# EAGLE board Ex Pin Expander (EAGLE 7.2.0)

Size 27 x 36 mm. Coordinates in mm from the lower left corner, seen from the top.
Outline: 0,0 27,0 27,36 0,36 0,0
Copper layers (1*16): Top 0.035mm / dielectric 1.5mm / Bottom 0.035mm
Design rules "default": minimum track width 10mil, minimum drill 24mil, track to track 8mil, track to pad 8mil, pad to pad 8mil, via to via 8mil, smd to smd 8mil, copper to edge 40mil, drill to drill 8mil, minimum pad ring 10mil, minimum via ring 8mil, stop-mask expansion 4mil, vias tented up to drill 0mil, thermal gap 10mil

## Footprints (pad centres in the part's own frame; a part is rotated, then mirrored left to right if it is on the bottom)
1X10-BIG = drill 1.016 pad 1.778 octagon: 1 -11.43,0; 2 -8.89,0; 3 -6.35,0; 4 -3.81,0; 5 -1.27,0; 6 1.27,0; 7 3.81,0; 8 6.35,0; 9 8.89,0; 10 11.43,0

## Placement (x,y rotation side)
NUSBIO_IN_0  PINHD-1X10  [1X10-BIG]  13.5,1.5 180 top
NUSBIO_OUT_0  PINHD-1X10  [1X10-BIG]  13.5,34.5 180 top
NUSBIO_OUT_1  PINHD-1X10  [1X10-BIG]  25,17 270 top
NUSBIO_OUT_2  PINHD-1X10  [1X10-BIG]  2,17 270 top

## Library data of the parts
NUSBIO_IN_0 NUSBIO_OUT_0 NUSBIO_OUT_1 NUSBIO_OUT_2 = adafruit

## Nets
N$1: NUSBIO_IN_0.10 NUSBIO_OUT_0.10 NUSBIO_OUT_1.10 NUSBIO_OUT_2.10
N$2: NUSBIO_IN_0.9 NUSBIO_OUT_0.9 NUSBIO_OUT_1.9 NUSBIO_OUT_2.9
N$3: NUSBIO_IN_0.8 NUSBIO_OUT_0.8 NUSBIO_OUT_1.8 NUSBIO_OUT_2.8
N$4: NUSBIO_IN_0.7 NUSBIO_OUT_0.7 NUSBIO_OUT_1.7 NUSBIO_OUT_2.7
N$5: NUSBIO_IN_0.6 NUSBIO_OUT_0.6 NUSBIO_OUT_1.6 NUSBIO_OUT_2.6
N$6: NUSBIO_IN_0.5 NUSBIO_OUT_0.5 NUSBIO_OUT_1.5 NUSBIO_OUT_2.5
N$7: NUSBIO_IN_0.4 NUSBIO_OUT_0.4 NUSBIO_OUT_1.4 NUSBIO_OUT_2.4
N$8: NUSBIO_IN_0.3 NUSBIO_OUT_0.3 NUSBIO_OUT_1.3 NUSBIO_OUT_2.3
N$9: NUSBIO_IN_0.2 NUSBIO_OUT_0.2 NUSBIO_OUT_1.2 NUSBIO_OUT_2.2
N$10: NUSBIO_IN_0.1 NUSBIO_OUT_0.1 NUSBIO_OUT_1.1 NUSBIO_OUT_2.1

## Tracks (layer width: path | path; a pad name or v marks a point on that pad's centre or on a via)
N$1  (3 unrouted)
N$2  (3 unrouted)
N$3  (3 unrouted)
N$4  (3 unrouted)
N$5  (3 unrouted)
N$6  (3 unrouted)
N$7  (3 unrouted)
N$8  (3 unrouted)
N$9  (3 unrouted)
N$10  (3 unrouted)

## Text on the board
tNames: GND | VCC | 7 | 6 | 5 | 4 | 3 | 2 | 1 | 0 | 0 | 0 | 1 | 1 | 2 | 2 | 3 | 3 | 4 | 4 | 5 | 5 | 6 | 6 | 7 | 7 | VCC | VCC | GND | GND | PCBv1 - 2016-01 | Nusbio Expander
bNames: MadeInTheUSB.net